# Altium PCB FiringBoard.PcbDoc
Units mm, origin at the board's own origin, x right, y up, seen from the top; angles counter-clockwise.
Board outline 66.3 x 18 mm, 2 copper layers (Top Layer, Bottom Layer); 51 components, 36 nets, 153 pads, 71 vias.
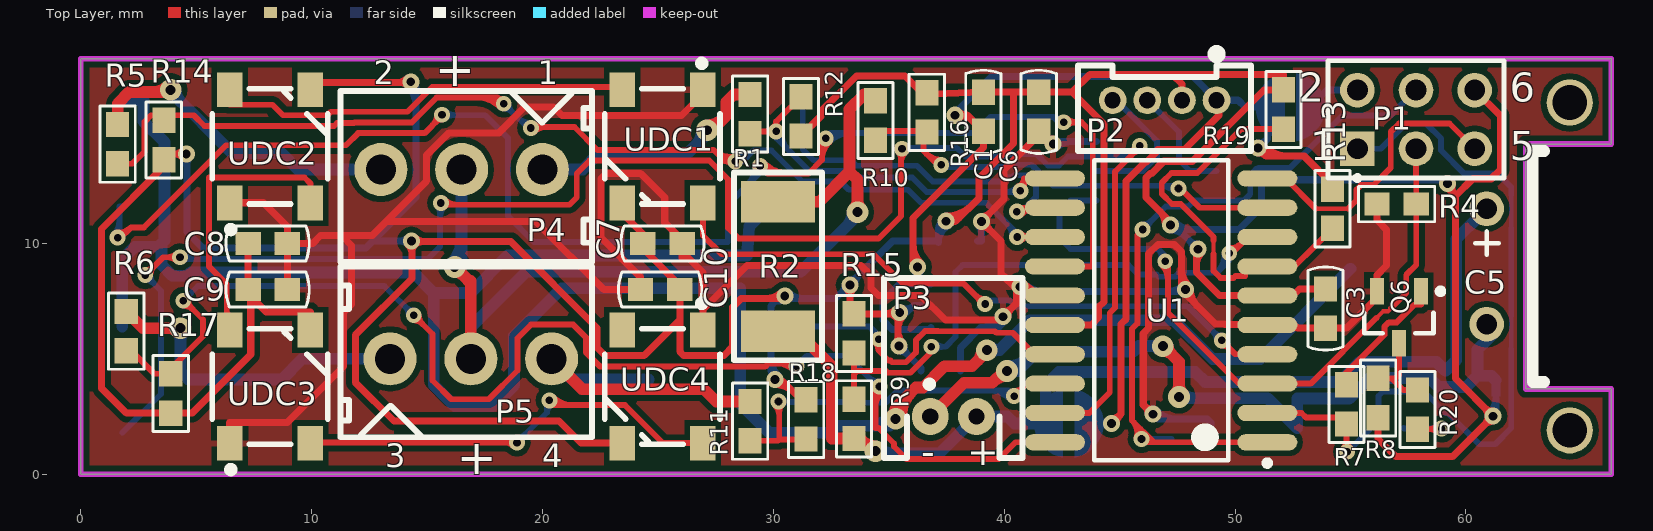
[diagram p0: Top Layer view]
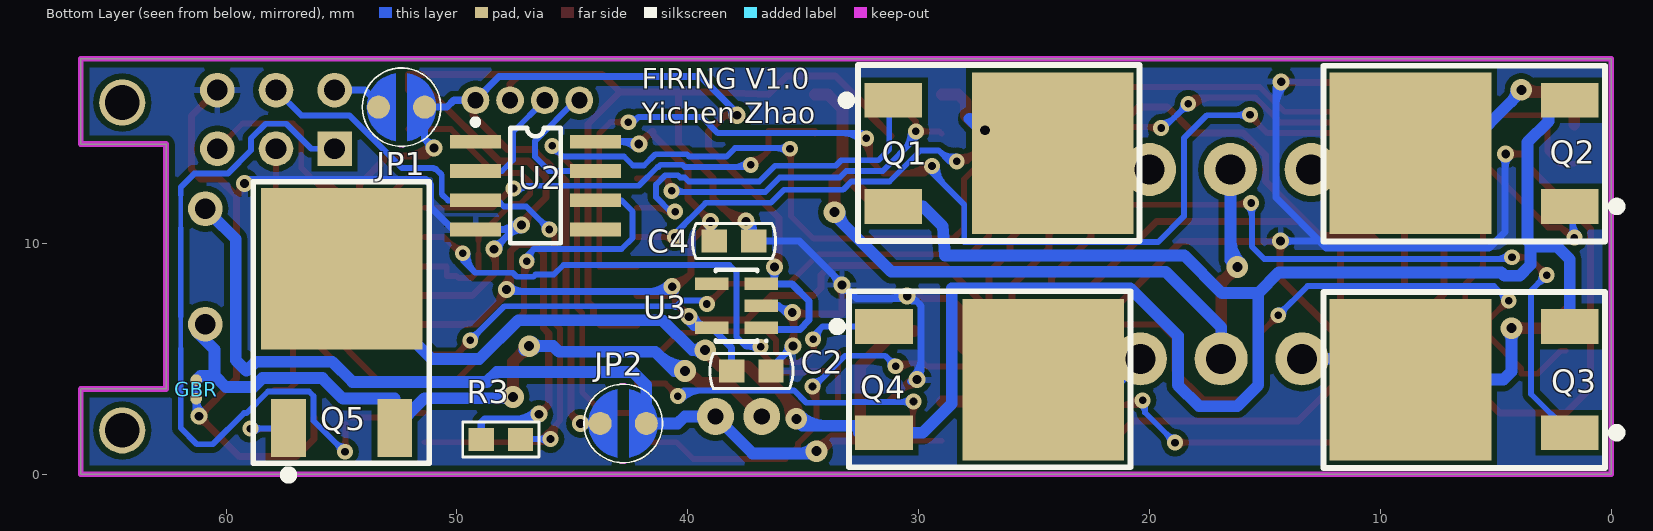
[diagram p1: Bottom Layer view, seen from below]

## Layer stack, top to bottom
Top Layer: signal copper 0.0356
Dielectric: core 0.32, FR-4, Dk 4.8
Bottom Layer: signal copper 0.0356

## Board outline
0,0 66.3,0 66.3,3.7 62.6,3.7 62.6,14.3 66.3,14.3 66.3,18 0,18

## Design rules (kind name [scope] priority, off if disabled: settings)
Clearance Pours [InPolygon] p1: gap=0.254
Clearance "Board Edge (Keepout)" [(OnLayer('Keep-Out Layer'))] p2: gap=0.381
Clearance [All] p3: gap=0.203
HoleSize [All] p1: absolutevalues=TRUE maxlimit=2.54 minlimit=0.33 maxpercent=80.000 minpercent=20.000
MinimumAnnularRing MinimumAnnularRing_1 [InNetClass('High Power')] p1: minimumring=0.254
MinimumAnnularRing [All] p2: minimumring=0.178
MinimumSolderMaskSliver [All] p1 off: minsoldermaskwidth=0.254
PolygonConnect [All] p1: connectstyle=Relief reliefconductorwidth=0.254 reliefentries=4 polygonreliefangle="90 Angle" airgapwidth=0.254
RoutingVias "High Power Vias" [(InNetClass('High Power'))] p1: holewidth=0.432 width=0.61 viastyle="Through Hole" minholewidth=0.432 minwidth=0.61 maxholewidth=0.711 maxwidth=1.27
RoutingVias "Power Vias" [(InNetClass('Power'))] p2: holewidth=0.381 width=0.559 viastyle="Through Hole" minholewidth=0.381 minwidth=0.559 maxholewidth=0.711 maxwidth=1.27
RoutingVias [All] p3: holewidth=0.33 width=0.508 viastyle="Through Hole" minholewidth=0.33 minwidth=0.508 maxholewidth=0.711 maxwidth=1.27
SilkToSilkClearance [All] p1 off: silktosilkclearance=0.254
SilkToSolderMaskClearance [IsPad] p1 off: minsilkscreentomaskgap=0.254 clearancetoexposedcopper=TRUE
SolderMaskExpansion [All] p1: expansion=0.102
Width Power [InNetClass('Power')] p1: maxlimit=1.016 minlimit=0.305 preferedwidth=0.305
Width "High Power" [(InNetClass('High Power'))] p2: maxlimit=1.016 minlimit=0.508 preferedwidth=0.508
Width [All] p3: maxlimit=1.016 minlimit=0.178 preferedwidth=0.254
24 further rules are at their usual default settings.

## Classes and differential pairs
net class Power: 3.3V EXT_PWR PROG_5V VSS
net class "High Power": CHANNEL1_CONN CHANNEL2_CONN CHANNEL3_CONN CHANNEL4_CONN EXT_BAT MASTER_N NetQ1_2 PGND

## Components (designator, comment, footprint, x,y, rotation, side; value= is the part's Value field where it differs from the comment)
C1 "Cap Semi" C0603 39.1,15.7 r270 top
C2 "Cap Semi" C0603 37.25,4.475 r0 bottom
C3 "Cap Semi" C0603 53.925,7.175 r270 top
C4 "Cap Semi" C0603 38,10.1 r0 bottom
C5 "Firing Charge Cap" CAPPR-10x12.5-Flat-Right 60.9,9 r270 top
C6 "Cap Semi" C0603 41.5,15.7 r90 top
C7 "Cap Semi" C0603 25.2,10 r0 top
C8 "Cap Semi" C0603 8.1,10 r0 top
C9 "Cap Semi" C0603 8.1,8 r0 top
C10 "Cap Semi" C0603 25.1,8 r180 top
GBR "GROUND_BRIDGE" GROUND_BRIDGE 61.3,3.275 r90 bottom net-tie
JP1 "Power from ISP jumper" SOLDER-JUMPER-3D 52.4,15.9 r180 bottom
JP2 "Fire from bus jumper" SOLDER-JUMPER-3D 42.8,2.2 r0 bottom
P1 "ISP Header 3x2" HDR2X3-AVRISP 55.3,14.1 r0 top
P2 "Off-Board Connector 1x4, JST" 1x04-1.5MM-JST 49.2,16.2 r180 top
P3 "Ext-Bat connector, JST" JST-2-PTH-NS 37.8,2.5 r0 top
P4 "Firing Connector 3.5mm" 20020327-C031B01LF 20,13.2 r180 top
P5 "Firing Connector 3.5mm" 20020327-C031B01LF 13.4,5 r0 top
Q1 "DMG4468LK3" TO252 31.1,16.2 r270 bottom
Q2 "DMG4468LK3" TO252 1.8,11.6 r90 bottom
Q3 "DMG4468LK3" TO252 1.8,1.8 r90 bottom
Q4 "DMG4468LK3" TO252 31.5,6.4 r270 bottom
Q5 "DMG4468LK3" TO252 57.3,2 r180 bottom
Q6 "PNP-SOT23" SOT-23B_N 57.1,6.8 r270 top
R1 "Res3" R0603-3D 29,15.6 r90 top
R2 "Res3" R2512 30.2,9 r270 top
R3 "Res3" R0603-3D 48.1,1.5 r0 bottom
R4 "Res3" R0603-3D 57,11.7 r180 top
R5 "Res3" R0603-3D 1.6,14.3 r90 top
R6 "Res3" R0603-3D 1.975,6.2 r90 top
R7 "Res3" R0603-3D 54.825,3.025 r90 top
R8 "Res3" R0603-3D 56.2,3.3 r90 top
R9 "Res3" R0603-3D 33.5,2.4 r270 top
R10 "Res3" R0603-3D 34.425,15.325 r90 top
R11 "Res3" R0603-3D 29,2.3 r90 top
R12 "Res3" R0603-3D 31.2,15.5 r90 top
R13 "Res3" R0603-3D 54.225,11.5 r90 top
R14 "Res3" R0603-3D 3.6,14.475 r90 top
R15 "Res3" R0603-3D 33.5,6.1 r270 top
R16 "Res3" R0603-3D 36.65,15.675 r270 top
R17 "Res3" R0603-3D 3.9,3.5 r90 top
R18 "Res3" R0603-3D 31.425,2.375 r270 top
R19 "Res3" R0603-3D 52.1,15.8 r270 top
R20 "Res3" R0603-3D 57.9,2.8 r90 top
U1 "ATtiny461V-10SUR" 20S2_M 46.8,7.1 r180 top
U2 "P82B715P" SO-G8 46.6,12.5 r270 bottom
U3 "LDK220" SO-G5/P.95 37.9,7.3 r90 bottom
UDC1 "Neopixel, 4-pin, 5050" LED5050 25.2,14.2 r270 top
UDC2 "Neopixel, 4-pin, 5050" LED5050 8.2,14.2 r90 top
UDC3 "Neopixel, 4-pin, 5050" LED5050 8.2,3.8 r90 top
UDC4 "Neopixel, 4-pin, 5050" LED5050 25.2,3.8 r270 top

## Footprints (in the part's own frame and the unit in brackets; to place one, negate y for a bottom-side part, rotate by r counter-clockwise, add the part's x,y. Pads: shape width x height; smd on the part's side, far side on the other; paste and mask are expansions set on the pad)
1x04-1.5MM-JST [mm]
  round 1.2 hole 0.7: 1(0,0) 2(1.5,0) 3(3,0) 4(4.5,0)
  silkscreen extent -1.5,-2.14 6,2.2, body extent -1.5,-1.5 6,2.2, height 5
20S2_M [mm] "SOIC, 20-Leads, Body 12.8x7.5mm, Pitch 1.27mm, IPC Low Density"
  oval 2.6x0.7 smd: 1(-4.6,5.715) 2(-4.6,4.445) 3(-4.6,3.175) 4(-4.6,1.905) 5(-4.6,0.635) 6(-4.6,-0.635) 7(-4.6,-1.905) 8(-4.6,-3.175) 9(-4.6,-4.445) 10(-4.6,-5.715) 11(4.6,-5.715) 12(4.6,-4.445) 13(4.6,-3.175) 14(4.6,-1.905) 15(4.6,-0.635) 16(4.6,0.635) 17(4.6,1.905) 18(4.6,3.175) 19(4.6,4.445) 20(4.6,5.715)
  silkscreen extent -4.72,-6.5 2.9,6.74, body extent -3.8,-6.5 3.8,6.5, height 2.65
20020327-C031B01LF [mm] "Fixed Terminal Blocks 3P 3.50MM TERM BLK FIXED HORIZONTAL"
  round 2.3 hole 1.3: 1(0,0) 2(3.5,0) 3(7,0)
  silkscreen extent -2.15,-3.4 8.75,4, body extent -1.65,-3.05 8.25,3.56, height 8.5
C0603 [mm]
  rect 1.1x1 smd: 1(-0.85,0) 2(0.85,0)
  silkscreen extent -1.8,-0.76 1.8,0.76
CAPPR-10x12.5-Flat-Right [mm]
  round 1.5 hole 0.9: 1(-2.5,0) 2(2.5,0)
  silkscreen extent -5,-0.5 5,2.5, body extent -5,-0.8 4.96,14.5, height 4.99
GROUND_BRIDGE [mil]
  round 20 smd paste-10 mask-10: 1(0,0) 2(31.5,0)
  Top Layer region: 3.94,7.87 27.56,7.87 27.56,-7.87 3.94,-7.87
HDR2X3-AVRISP [mm] "Connector; Header; 3x2 Position"
  rect 1.5x1.5 hole 0.9: 1(0,0)
  round 1.5 hole 0.9: 2(0,2.54) 3(2.54,0) 4(2.54,2.54) 5(5.08,0) 6(5.08,2.54)
  silkscreen extent -1.27,-1.43 6.35,3.81, body extent -1.3,-1.3 6.4,3.8, height 1
JST-2-PTH-NS [mm]
  round 1.6 hole 0.7: 1(-1,0) 2(1,0)
  silkscreen extent -3,-1.8 3,6
LED5050 [mm]
  rect 1.5x1.1 smd: 1(-2.45,1.75) 2(-2.45,-1.75) 3(2.45,-1.75) 4(2.45,1.75)
  silkscreen extent -3.74,-2.5 2.5,2.5, body extent -2.5,-2.5 2.5,2.5, height 2
R0603-3D [mm]
  rect 1.1x1 smd: 1(-0.85,0) 2(0.85,0)
  silkscreen extent -1.65,-0.76 1.65,0.76, body extent -0.76,-0.38 0.76,0.38, height 0.51
R2512 [mm] "Chip Resistor; Body 6.3 x 3.2 mm (LxW typ)"
  rect 1.8x3.2 smd: 1(-2.8,0) 2(2.8,0)
  silkscreen extent -4.06,-1.91 4.06,1.9
SO-G5/P.95 [mm] "SOT-23/SC-74A; 5 Leads; Body 3.1 x 3 mm, inc. leads (LxW max)"
  rect 0.55x1.45 smd: 1(-0.95,-1.075) 2(0,-1.075) 3(0.95,-1.075) 4(0.95,1.075) 5(-0.95,1.075)
  silkscreen extent -1.57,-1.35 1.55,0.9
SO-G8 [mm] "Small Outline; 8 Leads; Body Width 3.9 mm; Pitch 1.27 mm"
  rect 0.6x2.2 smd: 1(-1.905,-2.6) 2(-0.635,-2.6) 3(0.635,-2.6) 4(1.905,-2.6) 5(1.905,2.6) 6(0.635,2.6) 7(-0.635,2.6) 8(-1.905,2.6)
  silkscreen extent -2.88,-2.72 2.5,1.1
SOLDER-JUMPER-3D [mm]
  round 1 smd: 1(-1,0) 2(1,0)
  Top Layer region: 0.254,-1.477 0.892,-1.205 1.339,-0.675 1.5,0 1.339,0.675 0.892,1.205 0.254,1.477 0.254,1.477
  Top Layer region: -0.254,-1.477 -0.254,1.477 -0.892,1.205 -1.339,0.675 -1.5,0 -1.339,-0.675 -0.892,-1.205 -0.254,-1.477
  Top Layer keep-out lines w0.076: 0.101,-1.709 cw(c0,0) -0.101,-1.709 ; 0.101,1.709 ccw(c0,0) -0.101,1.709
  silkscreen extent -1.7,-1.7 1.7,1.7, body extent -1.29,-1.3 1.3,1.3, height 0.1
SOT-23B_N [mm] "SOT23, 3-Leads, Body 2.9x1.3mm, Pitch 0.95mm, Lead Span 2.4mm, IPC Medium Density"
  rect 1.15x0.6 smd: 1(-1.125,0.95) 2(-1.125,-0.95) 3(1.125,0)
  silkscreen extent -1.25,-1.5 0.7,1.93, body extent -0.7,-1.5 0.7,1.5, height 1.14
TO252 [mm]
  rect 1.5x2.5 smd: 1(0,0) 2(4.6,0)
  rect 7x7 smd: 3(2.3,6.9)
  silkscreen extent -1.52,-2.16 6.1,10.67, body extent -1.02,2.67 5.59,9.53, height 2.29

## Part data
C1 C2 C3 C4 C6 C7 C8 C9 C10: "Capacitor (Semiconductor SIM Model)"
C5: library part "Cap Pol1", "Polarized Capacitor (Radial)"
JP1 JP2: library part SolderJumper, "Solder Configuration Jumper"
P1: library part "Header 3X2", "Header, 3-Pin, Dual row"
P2: library part "Header 4", "Header, 4-Pin"
P3: library part "Header 2", "Header, 2-Pin"
P4 P5: library part "Header 3", "Header, 3-Pin"
Q1 Q2 Q3 Q4 Q5: "N-CHANNEL ENHANCEMENT MODE MOSFET"
Q6: "PNP Bipolar Transistor - SOT23"
R1 R2 R3 R4 R5 R6 R7 R8 R9 R10 R11 R12 R13 R14 R15 R16 R17 R18 R19 R20: "Resistor"
U1: library part CMP-0093-00289-1, "8-bit AVR Microcontroller, 1.8-5.5V, 10MHz, 4KB Flash, 256 Bytes EEPROM, 256 Bytes SRAM, 20-pin SOIC, Industrial Grade (-40°C to 85°C), Reel"
U2: library part CMP-0314-00015-1, "I2C Bus Extender, 2 Channel Width, 3.0 to 12.0 V, -40 to 85 degC, 8-pin PDIP (P), Pb-Free (RoHS)"
U3: "200 mA low quiescent current and low noise LDO"
UDC1 UDC2 UDC3 UDC4: library part WS2812B

## Free pads (board coordinates)
  round 2 hole 1.5: 0(64.5,16.1) ""(64.5,1.9)

## Via types
v1: diameter 0.686, hole 0.33, Top Layer to Bottom Layer, 17 vias
v2: diameter 0.686, hole 0.33, Top Layer to Bottom Layer, tented both sides, 14 vias
v3: diameter 0.737, hole 0.381, Top Layer to Bottom Layer, 11 vias
v4: diameter 0.94, hole 0.432, Top Layer to Bottom Layer, 9 vias
v5: diameter 0.737, hole 0.381, Top Layer to Bottom Layer, tented both sides, 9 vias
v6: diameter 0.686, hole 0.33, Top Layer to Bottom Layer, tented top, 5 vias
v7: diameter 0.737, hole 0.381, Top Layer to Bottom Layer, tented top, 2 vias
v8: diameter 0.94, hole 0.432, Top Layer to Bottom Layer, tented both sides, 2 vias
v9: diameter 0.737, hole 0.381, Top Layer to Bottom Layer, tented bottom, 1 vias
v10: diameter 0.686, hole 0.33, Top Layer to Bottom Layer, tented bottom, 1 vias

## Nets (pads, with @x,y where several pads share a name; then routed paths per layer and width w, separated by ;. In a path a pad name is that pad's centre, name@x,y a point inside that pad or via, vN(x,y) a via of type N, cw(c..) or ccw(c..) an arc to the next point about the centre after c; other vN are vias at no path point)
3.3V: C2.2 C3.2 C4.2 C6.1 C7.2 C8.2 C9.2 C10.2 Q6.2 R3.2 R4.2 U1.5 U1.15 U2.8 U3.5 UDC1.1 UDC2.1 UDC3.1 UDC4.1 | length 153.8
  Top Layer w0.305: UDC3.1 6.45,2.235 8.948,2.235 11.386,4.674 11.386,7.014 11.735,7.362 11.735,9.911 11.311,10.335 ; UDC2.1 6.45,11.76 7.925,11.76 8.95,10.735 C8.2 ; C9.2 C8.2 ; 13.244,10.95 19.708,10.95 22.658,8 C10.2 24.25,8.534 22.53,10.255 22.53,12.802 22.758,13.03 24.257,13.03 25.298,11.989 25.298,10.912 26.05,10.16 C7.2 26.05,9.364 26.324,9.364 26.95,8.738 26.95,7.138 ; UDC4.1 26.95,7.138 ; UDC1.1 26.95,16.459 26.027,15.536 20.852,15.536 20.488,15.9 19.225,15.9 18.116,14.791 15.959,14.791 14.986,13.818 14.986,12.692 12.629,10.335 11.311,10.335 ; v3@39.014,10.731 cw(c39.014,10.21) 39.383,10.579 cw(c39.752,10.947) 39.23,10.947 cw(c39.752,10.947) 39.383,11.316 cw(c39.014,11.685) v3@39.014,11.163 ; 39.878,8.672 ccw(c40.677,9.472) v5@40.677,8.341 ; v5@39.952,7.041 ccw(c39.952,7.559) 40.318,7.193 ; v5@40.168,6.825 cw(c40.693,6.825) 40.322,7.197 ; 40.526,7.385 cw(c41.24,7.385) v5@40.808,7.954 ; v5@40.538,7.925 40.767,7.735 ; v5@40.614,8.063 ccw(c41.405,8.853) U1.15@41.405,7.735 ; v5(40.677,8.125) 40.675,8.125 40.55,8 39.865,8.685 39.865,10.096 v3(39.014,10.947) 40.003,11.936 40.003,13.203 41.5,14.7 C6.1 41.575,14.85 v3(42.125,14.3) ; v5@40.83,8.278 ccw(c42.141,9.589) U1.15@42.141,7.735 ; v3@41.909,14.3 ccw(c41.388,14.3) 41.756,14.669 ccw(c42.125,15.037) v3@42.125,14.516 ; U1.15 40.767,7.735 ; 46.049,2.982 ccw(c46.45,3.383) v9@46.45,2.816 ; 46.095,2.936 cw(c45.758,2.6) v9@46.234,2.6 ; v9@46.431,2.6 46.025,3.006 46.025,6.103 46.253,6.331 46.253,9.553 46.657,9.957 47.368,9.957 47.675,9.65 47.675,7.976 49.151,6.5 49.535,6.5 49.545,6.49 52.553,6.49 52.718,6.325 C3.2 54.825,6.325 56.15,7.65 56.15,8.622 56.566,9.038 56.566,10.592 56.15,11.008 R4.2 ; 47.675,8.944 ccw(c48.794,8.944) v3@48.003,8.153 ; v3@48.066,8 ccw(c49.067,8) 48.359,7.292 ; C8.2 10.052,10 10.387,10.335 11.311,10.335 ; 26.95,7.138 28.859,9.047 33.803,9.047 34.225,8.625 34.225,8.075 34.55,7.75 36.384,7.75 37.457,6.676 39.801,6.676 40.526,7.401 40.526,7.976 40.767,7.735
  Bottom Layer w0.305: C2.2 38.1,5.475 U3.5 ; C4.2 39.014,10.1 v3(39.014,10.947) ; v3@38.862,10.795 cw(c38.493,10.426) 39.014,10.426 cw(c39.536,10.426) v3@39.167,10.795 ; U3.5@39.406,6.35 ccw(c39.406,7.018) v5@40.036,6.796 ; v5@39.748,6.897 cw(c38.975,7.17) U3.5@38.975,6.35 ; v5@39.778,6.698 cw(c39.562,6.539) 39.751,6.35 ; v5@39.95,6.85 39.95,6.549 39.751,6.35 ; v5@40.538,7.925 v3@47.727,7.925 ; v5@40.83,8.278 ccw(c41.682,9.131) 41.682,7.925 ; v3@42.125,14.405 U2.8 ; v3@42.278,14.147 cw(c42.9,13.525) 42.9,14.405 ; v9(46.45,2.6) 46.662,2.388 48.798,2.388 48.95,2.235 R3.2 ; v9@46.603,2.753 ccw(c47.484,3.634) 47.484,2.388 ; 47.147,7.925 ccw(c47.147,8.703) v3@47.697,8.153 ; U3.5 39.751,6.35
  other v3: 47.85,8
  other v5: 39.952,6.825
CHANNEL1: Q1.1 U1.12 | length 18
  Top Layer w0.254: v1@40.525,11.402 cw(c40.869,11.058) 40.869,11.545 ; v1(40.552,11.376) 40.552,11.533 40.564,11.545 U1.12 ; v1@40.705,11.223 cw(c41.482,10.445) U1.12@41.482,11.545
  Bottom Layer w0.254: Q1.1 31.275,16.2 31.275,14.068 31.743,13.6 33.355,13.6 33.595,13.36 36.226,13.36 36.906,12.68 39.96,12.68 40.132,12.852 40.327,12.852 40.423,12.949 40.981,12.949 41.375,12.554 41.375,11.997 40.754,11.376 v1(40.552,11.376)
CHANNEL1_CONN: P4.1 Q1.3 R1.2 | length 13.8
  Top Layer w0.508: v4(27.125,14.9) 27.325,14.9 27.957,15.532 27.957,16.125 28.282,16.45 R1.2 ; v4@27.125,15.116 ccw(c27.125,16.12) 27.835,15.41
  Bottom Layer w0.508: P4.1 21.742,13.2 22.442,13.9 Q1.3 26.3,13.9 27.8,15.4 ; Q1.3@26.633,14.233 ccw(c25.965,14.9) Q1.3@26.909,14.9 ; Q1.3@27.125,15.116 ccw(c27.125,16.06) 27.792,15.392
CHANNEL1_CONN_SCALED: R1.1 R12.2 U1.11 | length 21
  Top Layer w0.254: R1.1 29.1,14.85 v2(30.125,14.85) 30.125,15.275 ; v2@29.972,14.697 ccw(c29.604,14.329) 29.604,14.85 ccw(c29.604,15.371) v2@29.972,15.003 ; v2@29.998,15.024 ccw(c29.815,15.275) 30.125,15.275 ; v2@30.252,15.024 cw(c30.435,15.275) 30.125,15.275 ; R12.2 30.125,15.275 ; v2@40.626,12.478 ccw(c40.498,12.815) 40.859,12.815 ; v2(40.702,12.276) 40.709,12.276 40.716,12.268 40.859,12.411 40.859,12.815 ; U1.11 40.859,12.815
  Bottom Layer w0.254: v2@30.087,14.85 ccw(c30.667,14.85) 30.257,14.44 ; v2(30.125,14.85) 30.125,14.572 31.559,13.137 33.138,13.137 33.425,12.85 36.023,12.85 36.65,12.223 40.658,12.223 40.703,12.268 40.716,12.268 40.709,12.276 v2(40.702,12.276) ; v2@30.341,14.85 ccw(c31.534,14.85) 30.69,14.006 ; 40.054,12.223 ccw(c40.054,12.924) v2@40.549,12.428 ; 40.308,12.223 cw(c40.308,11.881) v2@40.549,12.123
CHANNEL2: Q2.1 U1.14 | length 73.4
  Top Layer w0.254: v1(1.6,10.251) 1.611,10.251 1.676,10.185 2.184,10.693 ; v1@1.608,10.466 ccw(c1.635,11.243) 2.184,10.693 ; 15.246,15.121 ccw(c14.792,15.575) v1@15.434,15.575 ; 15.367,15.242 cw(c15.65,14.959) v1@15.65,15.359 ; v1@15.79,15.435 15.56,15.435 14.899,14.774 12.018,14.774 11.493,14.249 6.299,14.249 2.743,10.693 2.184,10.693 ; v6@29.398,13.323 ccw(c30.105,14.03) 30.105,13.03 ; v6@29.447,13.135 cw(c29.485,12.772) 29.743,13.03 ; v6@29.566,13.208 29.743,13.03 ; v6@29.578,13.503 ccw(c30.718,14.643) 30.718,13.03 ; v6@29.64,13.326 ccw(c29.999,13.286) 29.743,13.03 ; 32.106,13.62 cw(c33.205,13.62) v2@32.428,14.397 ; 32.106,14.233 cw(c32.592,14.233) v2@32.248,14.577 ; v2@32.182,14.478 32.106,14.402 32.106,13.614 31.521,13.03 29.743,13.03 ; U1.14 43.84,9.005 43.84,14.757 43.348,15.25 42.733,15.25 v2@42.545,15.062 ; v2@42.728,15.097 cw(c43.096,14.729) 43.096,15.25 cw(c43.096,15.771) v2@42.728,15.403
  Bottom Layer w0.254: v1@1.447,10.403 ccw(c0.895,10.956) Q2.1@1.676,10.956 ; v1(1.6,10.251) 1.611,10.251 1.676,10.185 1.676,11.6 Q2.1 ; 1.676,10.587 ccw(c1.937,10.587) v1@1.753,10.403 ; v1@15.65,15.392 15.808,15.55 17.521,15.55 18.517,14.554 18.517,11.176 19.629,10.064 28.03,10.064 28.03,11.673 v6@29.566,13.208 ; v1@15.803,15.422 cw(c16.111,15.114) 16.111,15.55 ; v1@15.803,15.728 ccw(c16.232,16.157) 16.232,15.55 ; 28.857,12.499 ccw(c28.006,13.35) v6@29.209,13.35 ; 29.29,12.933 ccw(c28.873,13.35) v6@29.463,13.35 ; v2@32.182,14.478 32.182,14.503 32.453,14.775 38.702,14.775 39.402,15.475 42.132,15.475 ; v2@32.248,14.577 cw(c32.726,14.099) 32.726,14.775 ; v2@32.428,14.397 cw(c33.339,13.486) 33.339,14.775 ; v2@42.463,15.435 cw(c42.323,15.666) 42.132,15.475 ; v2@42.545,15.062 42.132,15.475
  other v1: 15.65,15.575
  other v2: 32.275,14.55 42.575,15.25
  other v6: 29.425,13.35
CHANNEL2_CONN: P4.3 Q2.3 R5.2 | length 15.1
  Top Layer w0.508: R5.2 1.6,16.053 2.108,16.561 v4@3.912,16.561 ; 3.163,16.561 ccw(c3.163,17.387) v4@3.747,16.803
  Bottom Layer w0.508: v4@3.912,16.561 6.572,13.9 Q2.3 9.4,13.2 P4.3 ; v4@4.116,16.65 ccw(c4.824,16.65) 4.323,16.149
  other v4: 3.9,16.65
CHANNEL2_CONN_SCALED: R5.1 R14.2 U1.13 | length 55.6
  Top Layer w0.254: R5.1 2.235,13.45 2.769,13.983 2.769,15.271 3.048,15.55 4.902,15.55 5.365,15.088 10.973,15.088 11.1,15.215 11.836,15.215 11.862,15.24 14.34,15.24 15.418,16.318 18.057,16.318 ; 17.157,16.318 cw(c17.157,14.882) v1@18.172,15.897 ; 17.77,16.318 cw(c17.77,15.495) v1@18.352,16.077 ; v1@18.116,16.104 ccw(c17.899,16.159) 18.057,16.318 ; v1@18.271,16.259 cw(c18.216,16.476) 18.057,16.318 ; v1(18.325,16.05) 18.057,16.318 ; v1@19.5,15.037 21.388,15.037 22.379,14.046 27.418,14.046 ; v1@19.653,14.847 cw(c20.11,14.39) 20.11,15.037 ; v1@19.653,15.153 ccw(c19.932,15.432) 19.932,15.037 ; 27.764,13.7 ccw(c28.241,14.177) v6@28.357,13.512 ; v6@28.174,13.425 ccw(c27.896,13.227) 27.896,13.568 ; v6@28.192,13.697 cw(c27.897,13.97) 27.897,13.568 ; v6@28.313,13.763 cw(c28.139,14.767) 27.418,14.046 ; v6@28.393,13.568 27.896,13.568 ; v1(40.564,10.275) U1.13 ; v1@40.716,10.122 cw(c41.085,9.754) 41.085,10.275 cw(c41.085,10.796) v1@40.716,10.428 ; 27.418,14.046 27.896,13.568
  Bottom Layer w0.254: v1@18.325,15.834 cw(c18.325,15.313) 18.694,15.681 cw(c19.062,16.05) v1@18.541,16.05 ; v1(18.325,16.05) 19.375,15 v1(19.5,15) ; 18.918,15.457 ccw(c19.5,16.039) v1@19.5,15.216 ; v6@28.345,13.512 ccw(c28.415,14.029) 28.783,13.66 ; v6(28.35,13.55) 28.673,13.55 29.146,14.023 ; v6@28.379,13.764 ccw(c28.501,14.668) 29.146,14.023 ; 40.098,10.877 cw(c39.496,10.275) v1@40.348,10.275 ; v1(40.564,10.275) 40.564,10.412 39.24,11.736 39.24,11.76 36.398,11.76 35.833,12.325 33.274,12.325 32.918,12.68 31.27,12.68 29.927,14.023 29.146,14.023
CHANNEL3: Q3.1 U1.19 | length 83.4
  Top Layer w0.254: v1(2.8,8.625) 3.575,9.4 v1(4.3,9.4) ; v1@2.8,8.841 ccw(c2.8,9.362) 3.169,8.994 ccw(c3.537,8.625) v1@3.016,8.625 ; v1@4.147,9.247 ccw(c3.779,8.879) 3.779,9.4 ccw(c3.779,9.921) v1@4.147,9.553 ; v10@15.57,11.557 15.688,11.675 21.175,11.675 21.488,11.989 21.488,13.03 22.047,13.589 27.229,13.589 28.042,12.776 28.042,10.668 28.503,10.206 34.56,10.206 35.535,11.181 v6@35.535,13.945 ; v10@15.753,11.597 cw(c15.94,11.41) 15.94,11.675 ; v10@15.753,11.903 ccw(c16.302,12.452) 16.302,11.675 ; v6@35.422,13.947 cw(c35.151,13.676) 35.535,13.676 ; 35.535,13.481 cw(c36.194,13.481) v6@35.728,13.947 ; U1.19 43.688,2.655 44.577,3.544 44.577,6.985 44.806,7.214 44.806,13.106 v2@45.9,14.2 ; 45.472,13.772 ccw(c45.019,14.225) v2@45.659,14.225 ; 45.59,13.891 cw(c45.875,13.607) v2@45.875,14.009
  Bottom Layer w0.254: Q3.1 3.475,3.475 3.475,7.95 v1(2.8,8.625) ; v1@2.8,8.409 cw(c2.8,7.888) 3.169,8.256 cw(c3.537,8.625) v1@3.016,8.625 ; v1(4.3,9.4) 4.375,9.325 15.032,9.325 15.57,9.863 v10@15.57,11.557 ; v1@4.453,9.247 cw(c4.64,9.06) 4.64,9.325 ; v1@4.453,9.553 ccw(c5.002,10.102) 5.002,9.325 ; v10@15.447,11.597 cw(c15.151,11.301) 15.57,11.301 ; 15.57,11.157 cw(c16.193,11.157) v10@15.753,11.597 ; v6@35.535,13.945 35.715,14.125 37.962,14.125 38.321,13.767 39.948,13.767 40.044,13.863 41.409,13.863 41.897,13.375 42.373,13.375 42.763,13.765 45.415,13.765 v2(45.875,14.225) ; v6@35.728,13.947 cw(c36.157,13.518) 36.157,14.125 ; v6@35.728,14.253 ccw(c36.036,14.561) 36.036,14.125 ; v2@45.659,14.225 cw(c45.138,14.225) 45.506,13.856 cw(c45.875,13.488) v2@45.875,14.009
  other v6: 35.575,14.1
  other v10: 15.6,11.75
CHANNEL3_CONN: P5.1 Q3.3 R6.2 | length 15.9
  Top Layer w0.508: R6.2 2.7,6.325 4.1,6.325 v4@4.225,6.45 ; v4@4.172,6.172 ccw(c3.804,5.804) 3.804,6.325 ccw(c3.804,6.846) v4@4.172,6.478
  Bottom Layer w0.508: v4@4.172,6.172 cw(c3.804,5.804) 4.325,5.804 cw(c4.846,5.804) v4@4.478,6.172 ; v4@4.183,6.408 4.325,6.267 4.325,4.449 4.674,4.1 Q3.3 9.6,5 P5.1@13.4,5
  other v4: 4.325,6.325
CHANNEL3_CONN_SCALED: R6.1 R17.2 U1.20 | length 61.8
  Top Layer w0.254: R6.1 2.184,5.35 3.184,4.35 R17.2 3.9,4.575 5.3,5.975 5.3,6.7 4.482,7.518 v1(4.445,7.518) ; v1@4.445,7.302 cw(c4.445,6.693) 4.876,7.124 ; v1@4.661,7.518 ccw(c5.094,7.518) 4.788,7.212 ; v1@14.427,6.667 cw(c14.427,6.146) 14.796,6.515 cw(c15.164,6.883) v1@14.643,6.883 ; v1(14.427,6.883) 15.24,6.071 15.24,4.064 16.053,3.251 17.678,3.251 18.92,4.493 18.92,5.893 19.507,6.48 21.336,6.48 21.88,5.936 21.88,5.287 22.505,4.662 29.649,4.662 29.786,4.798 30.876,4.798 v2(31,4.675) ; 30.181,4.798 cw(c30.181,3.856) v2@30.847,4.522 ; 34.425,2.852 cw(c35.549,2.852) v6@34.754,3.648 ; 34.425,3.466 cw(c34.936,3.466) v6@34.575,3.827 ; v6@34.468,3.861 34.425,3.818 34.425,2 34.558,2 35.227,1.331 35.227,1.198 35.766,0.659 39.764,0.659 40.491,1.385 U1.20
  Bottom Layer w0.254: v1(4.445,7.518) 5.083,8.157 13.154,8.157 v1(14.427,6.883) ; v1@4.445,7.734 ccw(c4.445,8.256) 4.814,7.887 ccw(c5.182,7.518) v1@4.661,7.518 ; v1@14.211,6.883 ccw(c13.69,6.883) 14.059,7.252 ccw(c14.427,7.621) v1@14.427,7.099 ; v2@31,4.826 31.151,4.826 31.456,5.131 33.198,5.131 v6@34.627,3.702 ; v2@31,4.891 ccw(c31,5.412) 31.369,5.044 ccw(c31.737,4.675) v2@31.216,4.675 ; 34.108,4.221 ccw(c34.602,4.714) v6@34.602,4.016 ; 34.285,4.044 cw(c34.041,3.8) v6@34.386,3.8
  other v6: 34.602,3.8
CHANNEL4: Q4.1 U1.17 | length 14.6
  Top Layer w0.254: v6@34.422,5.697 cw(c34.129,5.404) 34.544,5.404 ; 34.544,5.38 cw(c34.899,5.38) v6@34.698,5.672 ; v6@34.544,6.031 34.544,5.381 34.995,4.93 35.07,4.93 35.149,4.852 35.752,4.852 36.177,5.277 36.177,5.804 36.571,6.198 37.129,6.198 37.133,6.194 39.596,6.194 39.663,6.127 40.373,6.127 41.305,5.195 U1.17
  Bottom Layer w0.254: Q4.1 34.175,6.4 ; v6@34.36,5.873 ccw(c33.718,5.943) 34.175,6.4 ; v6@34.525,5.7 34.525,6.05 34.175,6.4
  other v6: 34.575,5.85
CHANNEL4_CONN: P5.3 Q4.3 R11.2 | length 13.9
  Top Layer w0.508: P5.3@20.4,5 21.717,3.683 27,3.683 27.533,3.15 R11.2
  Bottom Layer w0.508: P5.3@20.4,5 21.3,4.1 Q4.3
CHANNEL4_CONN_SCALED: R11.1 R18.2 U1.18 | length 20.4
  Top Layer w0.254: R11.1 30.207,1.45 ; v2@30.072,2.997 cw(c29.626,2.551) 30.257,2.551 ; 30.257,1.5 R18.2@31.25,1.5 ; 30.257,1.507 v2@30.257,3.007 ; 30.257,2.707 cw(c30.668,2.707) v2@30.378,2.997 ; v2(40.43,3.385) 40.97,3.925 U1.18 ; v2@40.43,3.601 ccw(c40.43,4.122) 40.799,3.753 ccw(c41.167,3.385) v2@40.646,3.385
  Bottom Layer w0.254: v2@30.257,3.007 30.375,3.125 33.019,3.125 33.045,3.099 34.869,3.099 35.402,3.632 40.183,3.632 v2(40.43,3.385) ; v2@30.378,2.997 cw(c30.686,2.689) 30.686,3.125 ; v2@30.378,3.303 ccw(c30.807,3.732) 30.807,3.125 ; 39.312,3.632 cw(c39.312,2.267) v2@40.277,3.232 ; 39.925,3.632 cw(c39.925,2.88) v2@40.457,3.412
  other v2: 30.225,3.15
EXT_BAT: C5.1 JP2.1 P3.2 R2.2 R9.2 | length 45.6
  Top Layer w0.508: R2.2 31.011,6.2 32.537,4.674 32.537,1.55 33.75,1.55 v4@34.341,0.959 ; R9.2@33.842,1.458 ccw(c34.427,2.043) v4@34.427,1.216
  Bottom Layer w0.508: v4@34.377,0.9 37.2,0.9 P3.2 40.132,2.5 40.432,2.2 JP2.1 41.8,3.861 42.365,4.426 48.277,4.426 48.703,4 54.525,4 55.401,4.876 58.723,4.876 59.113,4.486 59.131,4.486 59.588,4.943 59.588,10.188 60.6,11.2 C5.1@61.3,11.2 ; v4@34.579,1.153 ccw(c35.189,1.763) 35.189,0.9
  other v4: 34.427,1
EXT_PWR: C1.2 JP1.2 JP2.2 P2.1 R13.2 U3.1 U3.3 | length 61.8
  Top Layer w0.305: 36.05,9.983 ccw(c37.261,9.983) v5@36.405,9.126 ; v5(36.252,8.974) 36.05,9.176 36.05,11.1 39.1,14.15 C1.2 38.4,15.55 v7(37.875,15.55) ; v7@38.028,15.397 cw(c38.396,15.029) 38.396,15.55 cw(c38.396,16.071) v7@38.028,15.703 ; v3(44.653,2.2) 45.06,2.606 45.06,6.502 45.288,6.731 45.288,12.7 46.115,13.527 46.164,13.527 46.574,13.936 46.574,13.985 46.653,14.065 47.815,14.065 49.3,15.55 49.3,16.1 P2.1 ; v3@44.653,2.416 ccw(c44.653,2.937) 45.022,2.569 ccw(c45.39,2.2) v3@44.869,2.2 ; v5@50.937,14.062 ccw(c51.63,14.755) 51.63,13.775 ; v5(51,14.125) 51.35,13.775 ; v5@51.008,13.909 cw(c51.025,13.45) 51.35,13.775 ; v5@51.153,14.278 ccw(c52.366,15.491) 52.366,13.775 ; v5@51.216,14.117 ccw(c51.675,14.1) 51.35,13.775 ; R13.2 54.225,12.55 53,13.775 51.35,13.775
  Bottom Layer w0.305: v5@36.099,8.821 cw(c35.731,8.452) 36.252,8.452 cw(c36.773,8.452) v5@36.405,8.821 ; v5(36.252,8.974) U3.3@36.252,8.25 ; U3.1 36.75,6.275 35.15,6.275 34.75,6.675 34.75,7.5 35.5,8.25 U3.3@36.252,8.25 ; U3.3 U3.3@36.252,8.25 ; v7@37.825,15.6 39.446,17.221 48.179,17.221 P2.1 50.14,16.2 50.44,15.9 JP1.2 51.4,14.525 v5(51,14.125) ; v7@38.091,15.55 cw(c38.854,15.55) 38.314,16.089 ; JP2.2 v3(44.653,2.2) ; v3@44.501,2.047 ccw(c44.132,1.679) 44.132,2.2 ccw(c44.132,2.721) v3@44.501,2.353 ; v5@51,14.341 ccw(c51,14.862) 51.369,14.494 ccw(c51.737,14.125) v5@51.216,14.125
EXT_PWR_SCALED: R13.1 R19.2 U1.7 | length 17.6
  Top Layer w0.178: 49.075,9.535 49.075,10.125
  Top Layer w0.254: 49.075,9.535 49.075,8.799 49.378,8.496 49.936,8.496 50.025,8.585 50.444,8.585 50.444,9.005 52.58,9.005 53.475,9.9 R13.1 ; 49.075,10.125 49.075,10.275 47.647,11.703 47.274,11.703 46.825,12.151 46.825,12.625 47.25,13.05 48.367,13.05 50.267,14.95 R19.2
MASTER_ENABLE: P1.1 R7.1 U1.2 | length 35.4
  Top Layer w0.254: U1.2 52.883,2.655 53.088,2.45 R7.1@54.6,2.45 ; v1@54.697,1.128 ccw(c54.389,1.436) 54.825,1.436 ; 54.825,1.557 ccw(c55.432,1.557) v1@55.003,1.128 ; R7.1 54.825,0.875 v1@54.85,0.85
  Bottom Layer w0.178: 61.965,5.45 61.965,6.835 ; 61.965,10.662 61.965,12.1
  Bottom Layer w0.254: v1@54.85,0.85 54.85,0.95 56.22,2.32 56.22,3.387 56.413,3.58 58.187,3.58 59.119,2.648 59.229,2.648 60.575,1.302 61.267,1.302 61.965,2 61.965,5.45 ; v1@54.85,1.191 ccw(c54.85,1.772) 55.261,1.361 ; v1@55.066,0.975 cw(c55.527,0.975) 55.201,1.301 ; P1.1 56.312,14.1 57.393,15.18 58.287,15.18 58.92,14.547 58.92,14.032 59.933,13.02 61.38,13.02 61.965,12.435 61.965,12.1 ; 61.965,6.835 61.965,10.662
  other v1: 54.85,0.975
MASTER_N: P4.2 P5.2 R2.1 R10.2 | length 42.2
  Top Layer w0.508: v4@16.2,8.759 cw(c16.2,8.238) 16.569,8.606 cw(c16.937,8.975) v4@16.416,8.975 ; v4(16.2,8.975) 16.8,8.375 16.9,8.375 P5.2@16.9,5 ; R2.1 32.002,11.8 33.3,13.098 ; v4@33.497,11.503 ccw(c33.129,11.871) 33.65,11.871 ccw(c34.171,11.871) v4@33.803,11.503 ; v4(33.65,11.35) 33.65,12.748 33.3,13.098 ; R10.2@34.5,16.45 33.934,16.45 33.3,15.816 33.3,13.098
  Bottom Layer w0.508: v4@16.047,9.128 ccw(c14.955,10.22) 16.5,10.22 ; v4(16.2,8.975) 16.5,9.275 P4.2 ; P5.2@16.9,5 16.9,6.364 19.305,8.768 31.193,8.768 33.675,11.25 v4@33.675,11.283 ; 33.193,10.768 ccw(c32.611,11.35) v4@33.434,11.35 ; v4@33.553,11.405 v4@33.629,11.329
MASTER_SCALE_N: R10.1 R16.2 U1.9 | length 21.1
  Top Layer w0.254: R10.1@34.5,14.75 34.5,14.875 36.5,14.875 36.5,14.021 v1@37.211,13.31 ; 36.643,13.878 ccw(c37.275,14.509) v1@37.275,13.616 ; v2@47.65,12.37 48.475,11.545 U1.9
  Bottom Layer w0.254: v1@37.211,13.31 40.138,13.31 40.234,13.406 41.177,13.406 41.273,13.31 41.315,13.31 42.128,12.497 47.523,12.497 v2@47.65,12.37 ; v1@37.428,13.553 ccw(c38.014,14.139) 38.014,13.31 ; 46.738,12.497 cw(c46.738,11.562) v2@47.4,12.223
  other v1: 37.275,13.4
  other v2: 47.552,12.376
MASTER_SCALE_P: R9.1 R15.2 U1.8 | length 27.7
  Top Layer w0.254: R9.1 33.5,4.325 33.648,4.473 34.88,4.473 34.959,4.395 35.941,4.395 36.85,5.303 v2(36.85,5.525) ; 33.5,4.475 R15.2 ; v2(49.752,9.575) 49.752,9.491 49.755,9.488 49.784,9.488 50.571,10.275 U1.8 ; v2@49.752,9.791 ccw(c49.752,10.601) U1.8@50.325,10.028
  Bottom Layer w0.254: v2(36.85,5.525) 37.467,5.525 37.897,5.955 37.897,8.763 38.202,9.068 45.39,9.068 45.808,8.65 46.598,8.65 46.696,8.552 47.414,8.552 47.587,8.725 49.213,8.725 ; v2@37.003,5.372 cw(c37.371,5.004) 37.371,5.525 cw(c37.371,6.046) v2@37.003,5.678 ; v2@49.537,9.565 cw(c48.427,9.511) 49.213,8.725 ; 49.618,9.13 ccw(c49.2,9.549) v2@49.79,9.577 ; v2(49.752,9.575) 49.752,9.265 49.213,8.725
NEO_PIXEL_DIN: U1.4 UDC1.4 | length 30.6
  Top Layer w0.254: UDC1.4 26.95,10.343 27.763,9.53 34.341,9.53 35.621,8.25 38.25,8.25 v2@39.116,7.384 ; 38.721,7.779 ccw(c39.175,8.233) v2@39.175,7.591 ; 38.842,7.658 cw(c38.559,7.375) v2@38.959,7.375 ; v2@49.4,5.8 50.005,5.195 U1.4 ; v2@49.425,5.584 cw(c49.425,5.123) 49.751,5.449 ; v2@49.641,5.8 ccw(c50.222,5.8) 49.811,5.389
  Bottom Layer w0.254: v2(39.175,7.375) 39.324,7.524 40.241,7.524 40.533,7.233 40.575,7.275 47.95,7.275 v2(49.425,5.8) ; v2@49.209,5.8 ccw(c48.688,5.8) 49.056,6.169 ccw(c49.425,6.537) v2@49.425,6.016
NetQ1_2: Q1.2 Q2.2 Q3.2 Q4.2 Q5.3 | length 106
  Top Layer w0.508: v4@35.155,2.559 ccw(c34.85,2.89) 35.3,2.89 ; v4@35.3,2.444 35.3,2.89 ; v4@35.446,2.56 cw(c35.743,2.89) 35.3,2.89 ; v4@35.518,2.4 cw(c37.225,2.4) 36.018,3.607 ; 38.839,4.905 ccw(c38.369,5.375) v8@39.034,5.375 ; v8@39.319,5.385 38.608,4.674 37.414,4.674 36.498,3.757 36.168,3.757 35.3,2.89
  Bottom Layer w0.508: Q3.2 1.8,9.307 2.344,9.851 3.358,9.851 3.5,9.993 ; Q2.2 2.718,16.2 2.718,15.291 3.632,14.376 3.632,10.125 3.5,9.993 ; Q1.2 29.82,11.6 28.956,10.736 28.86,9.48 18.497,9.48 16.866,7.849 15.291,7.849 ; 34.056,2.1 ccw(c34.056,3.646) v4@35.149,2.553 ; v4@35.236,2.286 35.05,2.1 32.588,2.1 32.588,1.8 Q4.2 29.823,1.8 28.575,3.048 28.575,8.057 20.833,8.057 18.771,5.994 18.771,3.861 17.856,2.946 16.205,2.946 15.291,3.861 15.291,7.849 ; v8@39.319,5.385 39.81,5.385 41.1,6.675 47.35,6.675 49.034,4.991 51.091,4.991 Q5.3 ; v8@39.403,5.222 cw(c39.795,4.83) 39.795,5.385 ; v8@39.403,5.528 ccw(c39.748,5.873) 39.748,5.385 ; 3.5,9.993 3.5,9.069 3.969,8.6 4.631,8.6 4.772,8.741 14.399,8.741 15.291,7.849
  other v4: 35.302,2.4
  other v8: 39.25,5.375
NetQ5_1: Q5.1 R20.1 | length 4.7
  Top Layer w0.254: R20.1@58.223,1.95 R20.1 58.925,1.95 v1(58.95,1.975) ; R20.1@58.368,1.95 ccw(c58.368,2.557) v1@58.797,2.128 ; 58.489,1.95 cw(c58.489,1.514) v1@58.797,1.822
  Bottom Layer w0.254: Q5.1 57.325,1.975 v1(58.95,1.975) ; v1@58.797,1.822 ccw(c58.429,1.454) 58.429,1.975 ccw(c58.429,2.496) v1@58.797,2.128
NetQ6_1: Q6.1 R7.2 | length 5.6
  Top Layer w0.254: R7.2@54.6,4.15 54.6,4.175 56.47,6.045 56.47,6.387 56.663,6.58 57.005,6.58 57.766,7.341 58.05,7.341 Q6.1
NetQ6_3: Q6.3 R8.2 R20.2 | length 3.6
  Top Layer w0.254: R8.2 56.794,4.15 ; Q6.3 57.1,4.304 56.946,4.15 56.794,4.15 ; R20.2 57.294,3.65 56.794,4.15
NetUDC1_2: UDC1.2 UDC2.4 | length 18.5
  Top Layer w0.254: UDC2.4 6.45,16.002 8.308,16.002 8.763,15.547 10.685,15.547 10.837,15.7 14.153,15.7 15.228,16.775 23.45,16.775 UDC1.2
NetUDC2_2: UDC2.2 UDC3.4 | length 12.3
  Top Layer w0.254: UDC3.4 6.45,6.883 6.325,7.008 6.325,8.23 5.563,8.992 5.563,12.852 9.696,12.852 9.95,12.598 UDC2.2
NetUDC3_2: UDC3.2 UDC4.4 | length 22.3
  Top Layer w0.254: UDC3.2 9.95,1.372 v1(18.898,1.372) ; v1@18.745,1.219 ccw(c18.376,0.85) 18.376,1.372 ccw(c18.376,1.893) v1@18.745,1.524 ; v1@20.273,3.173 ccw(c20.707,3.607) 20.707,2.993 ; v1(20.3,3.2) 20.507,2.993 23.573,2.993 25.217,1.35 UDC4.4 ; v1@20.453,3.353 ccw(c21.32,4.22) 21.32,2.993
  Bottom Layer w0.254: v1(18.898,1.372) 20.2,2.674 v1@20.2,3.2 ; v1@18.898,1.587 ccw(c18.898,2.109) 19.266,1.74 ccw(c19.635,1.372) v1@19.113,1.372 ; 20.2,2.665 cw(c20.596,2.665) v1@20.404,3.011
PGND: C5.2 GBR.2 P3.1 Q5.2 | length 37.6
  Top Layer w0.508: P3.1 38.262,3.962 39.487,3.962 39.975,4.45 v8@40.175,4.45 ; 39.543,4.018 cw(c40.125,3.436) v8@40.125,4.259 ; v4@46.875,5.334 cw(c46.875,4.753) 47.286,5.164 ; v4@47.075,5.375 47.575,4.875 v4(47.575,3.35) ; v4@47.091,5.55 ccw(c47.552,5.55) 47.226,5.224 ; v4@47.422,3.503 ccw(c47.054,3.871) 47.575,3.871 ccw(c48.096,3.871) v4@47.728,3.503
  Bottom Layer w0.508: v8@40.05,4.4 v8(40.125,4.475) 40.588,4.475 41.413,5.3 45.583,5.3 45.833,5.55 46.9,5.55 v4@47.075,5.375 ; v8@40.125,4.691 ccw(c40.125,6.33) 41.284,5.171 ; v4@46.722,5.397 ccw(c46.354,5.029) 46.354,5.55 ccw(c46.354,6.071) v4@46.722,5.703 ; v4(47.575,3.35) 47.636,3.289 51.411,3.289 Q5.2 52.7,3.277 54.94,3.277 55.828,4.164 58.429,4.164 58.819,3.774 60.006,3.774 60.499,4.267 ; v4@47.728,3.503 ccw(c48.244,4.019) 48.244,3.289 ; GBR.2 61.108,4.267 60.499,4.267 ; C5.2@61.3,6.2 60.499,5.399 60.499,4.267
  other v4: 46.875,5.55
PROG_5V: JP1.1 P1.2 | length 2.3
  Bottom Layer w0.305: JP1.1 53.4,16.053 53.987,16.64 P1.2
RST#: P1.5 U1.10 | length 12.7
  Top Layer w0.178: 53.5,11.5 54.892,11.5
  Top Layer w0.254: U1.10 52.185,12.815 53.5,11.5 ; 54.892,11.5 55.27,11.878 55.27,12.337 55.463,12.53 56.002,12.53 56.744,13.272 56.744,14.834 57.099,15.189 59.291,15.189 P1.5
SCL: P1.3 R4.1 U1.3 U2.6 | length 32.3
  Top Layer w0.178: 56.125,6.775 56.408,7.058 56.625,7.058 56.758,7.192
  Top Layer w0.254: v1@46.822,9.072 cw(c46.172,8.422) 47.092,8.422 ; v1@47.092,9.347 47.092,7.008 50.175,3.925 U1.3@52.496,3.925 ; U1.3 53.275,3.925 56.125,6.775 ; 56.758,7.192 57.42,7.853 57.42,8.637 57.85,9.067 57.85,12.878 57.84,12.888 P1.3
  Bottom Layer w0.254: U2.6 42.875,11.865 42.393,11.382 42.393,10.236 42.875,9.754 46.685,9.754 ; v1@46.775,9.307 ccw(c46.394,9.463) 46.685,9.754 ; v1@47.092,9.347 46.685,9.754
  other v1: 46.975,9.225
SCL_L: P2.4 U2.7 | length 6.2
  Bottom Layer w0.254: U2.7 46.01,13.135 46.625,13.75 46.625,14.427 44.852,16.2 P2.4
SDA: P1.4 R3.1 U1.1 U2.3 | length 34.9
  Top Layer w0.254: v1@45.74,1.58 ccw(c45,1.781) 45.542,2.323 ; 45.852,2.013 cw(c45.488,1.649) v1@45.985,1.514 ; v1(45.949,1.524) 46.088,1.385 46.481,1.385 ; v2(46,10.6) 45.771,10.371 45.771,6.531 45.542,6.303 45.542,2.323 ; v1@46.148,1.607 ccw(c46.481,1.745) 46.481,1.385 ; U1.1 46.481,1.385 ; 45.542,2.323 46.481,1.385
  Bottom Layer w0.254: v1(45.949,1.524) 47.25,1.524 R3.1 ; v2(46,10.6) 47,11.6 47.97,11.6 48.235,11.865 U2.3 50.394,11.865 50.662,12.133 50.662,12.968 50.909,13.216 50.967,13.216 51.01,13.259 52.375,13.259 54.661,15.545 56.745,15.545 P1.4 ; v2@46,10.816 ccw(c46,11.337) 46.369,10.969 ccw(c46.737,10.6) v2@46.216,10.6 ; v1@46.101,1.371 cw(c46.47,1.003) 46.47,1.524 cw(c46.47,2.045) v1@46.101,1.677
SDA_L: P2.3 U2.2 | length 5
  Bottom Layer w0.254: P2.3 47.574,14.826 47.574,13.614 48.054,13.135 U2.2
VSS: C1.1 C2.1 C3.1 C4.1 C6.2 C7.1 C8.1 C9.1 C10.1 GBR.1 P1.6 P2.2 R8.1 R12.1 R14.1 R15.1 R16.1 R17.1 R18.1 R19.1 U1.6 U1.16 U2.4 U3.2 UDC1.3 UDC2.3 UDC3.3 UDC4.3 | length 256.7
  Top Layer w0.305: v3@4.422,13.722 ccw(c4.054,13.354) 4.054,13.875 ccw(c4.054,14.396) v3@4.422,14.028 ; v3(4.575,13.875) 3.625,13.875 3.6,13.85 3.6,13.325 0.9,10.625 0.9,3.725 1.975,2.65 4.834,2.65 7.366,5.182 C9.1@7.366,7.696 ; C8.1 C9.1 C9.1@7.25,7.823 ; UDC3.3 9.95,7.036 8.026,7.036 C9.1@7.366,7.696 ; UDC2.3 9.95,16.967 v3@14.3,16.967 ; 13.7,16.967 ccw(c13.7,17.6) v3@14.147,17.153 ; 13.858,16.967 cw(c13.858,16.558) v3@14.147,16.847 ; v3@14.172,9.947 cw(c13.741,9.516) 14.351,9.516 ; 14.351,9.642 cw(c14.783,9.642) 14.478,9.947 cw(c14.786,9.639) 14.786,10.075 ; v3@14.478,10.253 ccw(c14.907,10.682) 14.907,10.075 ; UDC4.3 21.675,1.35 20.725,2.3 13.575,2.3 11.894,3.981 11.894,6.027 14.351,8.484 14.351,10.124 14.4,10.075 18.63,10.075 22.363,6.342 22.363,5.486 22.705,5.144 24.409,5.144 25.95,6.685 ; UDC1.3 23.45,11.314 24.35,10.414 C7.1 24.35,9.779 25.95,8.179 C10.1 25.95,6.685 ; 29.725,7.62 ccw(c29.725,8.5) v5@30.347,7.878 ; v7@30.075,3.884 cw(c30.075,2.699) 30.913,3.537 ; v7@30.35,4.025 30.425,4.025 R18.1@31.25,3.2 ; v5@30.505,7.62 28.612,7.62 28.244,7.252 28.244,5.525 27.864,5.144 26.114,5.144 25.95,5.309 25.95,6.685 ; R12.1 32.056,15.506 32.056,15.706 33.6,17.25 35.7,17.25 36.5,16.45 39.038,16.55 40.4,16.55 ; v3@33.172,8.047 cw(c32.804,7.679) 33.325,7.679 cw(c33.846,7.679) v3@33.478,8.047 ; v3@33.325,8.255 33.325,6.95 v5@35.154,6.95 ; 34.833,6.95 ccw(c34.833,7.642) v5@35.322,7.153 ; 35.074,6.95 cw(c35.074,6.599) v5@35.322,6.847 ; v5@35.299,5.703 ccw(c35.055,5.947) 35.4,5.947 ; v5@35.4,5.525 35.4,6.704 v5@35.154,6.95 ; 35.4,6.196 ccw(c36.098,6.196) v5@35.604,5.703 ; 35.4,6.298 cw(c36.177,6.298) v5@35.628,6.847 ; v5@35.425,6.95 v5@35.154,6.95 ; v3@37.475,10.874 ccw(c37.475,11.715) 38.07,11.12 ; v3(37.475,10.963) 37.913,10.963 ; v3@37.475,11.179 ccw(c37.475,12.756) 38.591,11.641 ; v3@37.647,10.831 cw(c37.913,10.627) 37.913,10.963 ; v3@37.647,11.094 ccw(c37.913,11.298) 37.913,10.963 ; U1.16 43.778,6.465 44.094,6.782 44.094,7.239 44.323,7.468 44.323,15.164 42.937,16.55 ; 46.732,11.409 cw(c46.123,10.8) v5@46.984,10.8 ; v5@47.295,10.846 46.15,11.991 46.15,12.843 46.325,13.019 46.375,13.019 46.913,13.557 48.157,13.557 51.25,16.65 R19.1 52.1,17.323 47.275,17.323 ; P2.2 47.7,16.898 47.275,17.323 ; 48.324,9.046 cw(c49.104,9.046) v5@48.553,9.597 ; v5@48.324,9.819 48.324,8.738 49.327,7.735 52.502,7.735 52.792,8.025 C3.1 ; R8.1 56.2,1.534 56.975,0.759 59.42,0.759 v3(61.175,2.514) 59.55,4.139 59.55,12.05 ; v3(59.2,12.6) 59.2,12.4 59.55,12.05 ; v3@59.41,12.549 ccw(c59.924,12.424) 59.55,12.05 ; P1.6 61.493,15.527 61.493,13.193 61.1,12.8 60.3,12.8 59.55,12.05 ; v3@61.175,2.298 ccw(c61.175,1.777) 60.806,2.146 ccw(c60.438,2.514) 60.959,2.514 ccw(c60.438,2.514) 60.806,2.883 ccw(c61.175,3.251) v3@61.175,2.73 ; C9.1@7.25,7.823 7.366,7.823 C9.1@7.366,7.696 ; C9.1@7.25,7.823 7.25,7.812 C9.1@7.366,7.696 ; 37.913,10.963 38.904,11.954 38.904,12.829 40.4,14.325 40.4,16.55 ; 40.4,16.55 C6.2 42.937,16.55 ; 42.937,16.55 43.71,17.323 47.275,17.323
  Bottom Layer w0.305: v3@4.422,13.722 cw(c3.993,13.293) 4.6,13.293 ; 4.6,13.414 cw(c5.036,13.414) v3@4.728,13.722 ; v3@4.6,13.726 4.6,10.497 5.29,9.808 12.348,9.808 14.529,11.989 14.529,16.771 v3(14.3,17) ; 12.64,10.1 14.182,10.1 v3@14.351,9.931 ; v3@14.147,16.847 cw(c13.226,15.926) 14.529,15.926 ; v3@14.172,9.947 ccw(c13.804,9.579) 13.804,10.1 ccw(c13.804,10.621) v3@14.172,10.253 ; v3@14.363,17.063 cw(c13.962,16.662) 14.529,16.662 ; 29.894,5.057 ccw(c31.032,5.057) v7@30.228,4.253 ; v7@29.907,4.236 ccw(c29.765,4.351) 29.894,4.481 ; v7@30.35,4.025 29.894,4.481 ; v5@30.388,7.54 ccw(c30.268,7.341) 30.103,7.506 ; v5@30.653,7.878 ccw(c31.275,8.5) 31.275,7.62 ; 32.878,7.799 cw(c33.325,7.352) v3@33.325,7.984 ; 32.989,7.91 ccw(c32.699,8.2) v3@33.109,8.2 ; v3@33.5,8.43 35.17,10.1 35.179,10.1 ; 33.599,8.53 cw(c33.325,8.804) 33.325,8.416 ccw(c33.325,8.826) 33.615,8.536 ; 33.726,8.647 ccw(c34.173,8.2) 33.541,8.2 cw(c34.195,8.2) 33.733,8.663 ; v5@35.452,5.334 cw(c35.452,4.813) 35.82,5.182 cw(c36.189,5.55) v5@35.668,5.55 ; v5(35.452,5.55) 36.4,4.602 C2.1 ; v5@35.475,7.05 35.525,7 35.778,7 36.078,7.3 ; v5@35.559,7.199 ccw(c35.744,7.635) 36.078,7.3 ; U3.2 36.078,7.3 ; C4.1@37.15,10.041 cw(c37.99,10.041) v3@37.58,10.774 ; C4.1@37.15,10.56 cw(c37.7,10.56) v3@37.432,11.04 ; v3(37.475,10.963) 37.15,10.638 C4.1 35.179,10.1 ; v5@47.2,10.584 cw(c47.2,9.717) 47.813,10.33 ; v5@47.295,10.846 47.546,10.595 47.548,10.595 ; v5@47.353,10.953 ccw(c48.216,11.816) U2.4@48.216,10.595 ; 48.02,10.123 ccw(c48.4,10.503) v5@48.4,9.966 ; 48.036,10.107 cw(c47.679,9.75) v5@48.184,9.75 ; v5@48.324,9.819 47.548,10.595 ; v3(59.2,12.6) 59.044,12.756 51.353,12.756 51.144,12.547 51.144,11.574 50.165,10.595 U2.4 47.548,10.595 ; v3@61.031,2.675 ccw(c60.497,3.275) GBR.1 61.3,2.639 v3(61.175,2.514) ; 29.894,4.481 29.894,7.297 30.103,7.506 ; 30.103,7.506 30.281,7.506 30.395,7.62 32.699,7.62 35.179,10.1
  other v3: 33.325,8.2 14.325,10.1
  other v5: 35.475,7 30.5,7.725 48.4,9.75 47.2,10.8
  other v7: 30.075,4.1
pads on no net: U2.1 U2.5 U3.4 UDC4.2

## Polygon pours and split planes (outlines as drawn)
3.3V on Top Layer "Power/Fast Signals-No Net" (solid, pour order 4): 0,18 0,0 66.3,0 66.3,3.7 62.6,3.7 62.6,14.3 66.3,14.3 66.3,18
VSS on Bottom Layer "Power/Fast Signals-No Net" (solid, pour order 6): 0,18 0,0 66.3,0 66.3,3.7 62.8,3.7 62.6,3.7 62.6,14.3 66.3,14.3 66.3,18

## Keep-outs
Keep-Out Layer:
  lines w0.254: 0,0 62.6,0 66.3,0 66.3,3.7 62.6,3.7 62.6,14.3 66.3,14.3 66.3,18 62.6,18 0,18 0,0

## Silkscreen, mask and mechanical layers (free items; w line width, h text height)
Top Overlay:
  text "+" at 17.1,18.1 h1.52 r180
  text "2" at 12.7,16.9 h1.02
  text "1" at 19.8,16.9 h1.02
  text "3" at 13.2,0.3 h1.02
  text "4" at 20,0.3 h1.02
  text "+" at 16.3,0 h1.52
Bottom Overlay:
  text "FIRING V1.0" at 42,16.4 h1.52
  text "Yichen Zhao" at 42,14.9 h1.52

## Dimensions
0,0 to 66.3,3.7 on Mechanical 1
0,18 to 0,0 on Mechanical 1

## Text inside footprints (layer, text, board x,y; h text height)
P1: Top Overlay "6" at 61.904,16.132 h1.27; Top Overlay "5" at 61.904,13.592 h1.27; Top Overlay "2" at 52.76,16.132 h1.27; Top Overlay "1" at 53.268,13.592 h1.27
P3: Top Overlay "-" at 36.4,0.4 h1.2; Top Overlay "+" at 38.4,0.4 h1.2